# EAGLE board ModuleCarrier-RAK811-v1.0.0 (EAGLE 7.7.0)
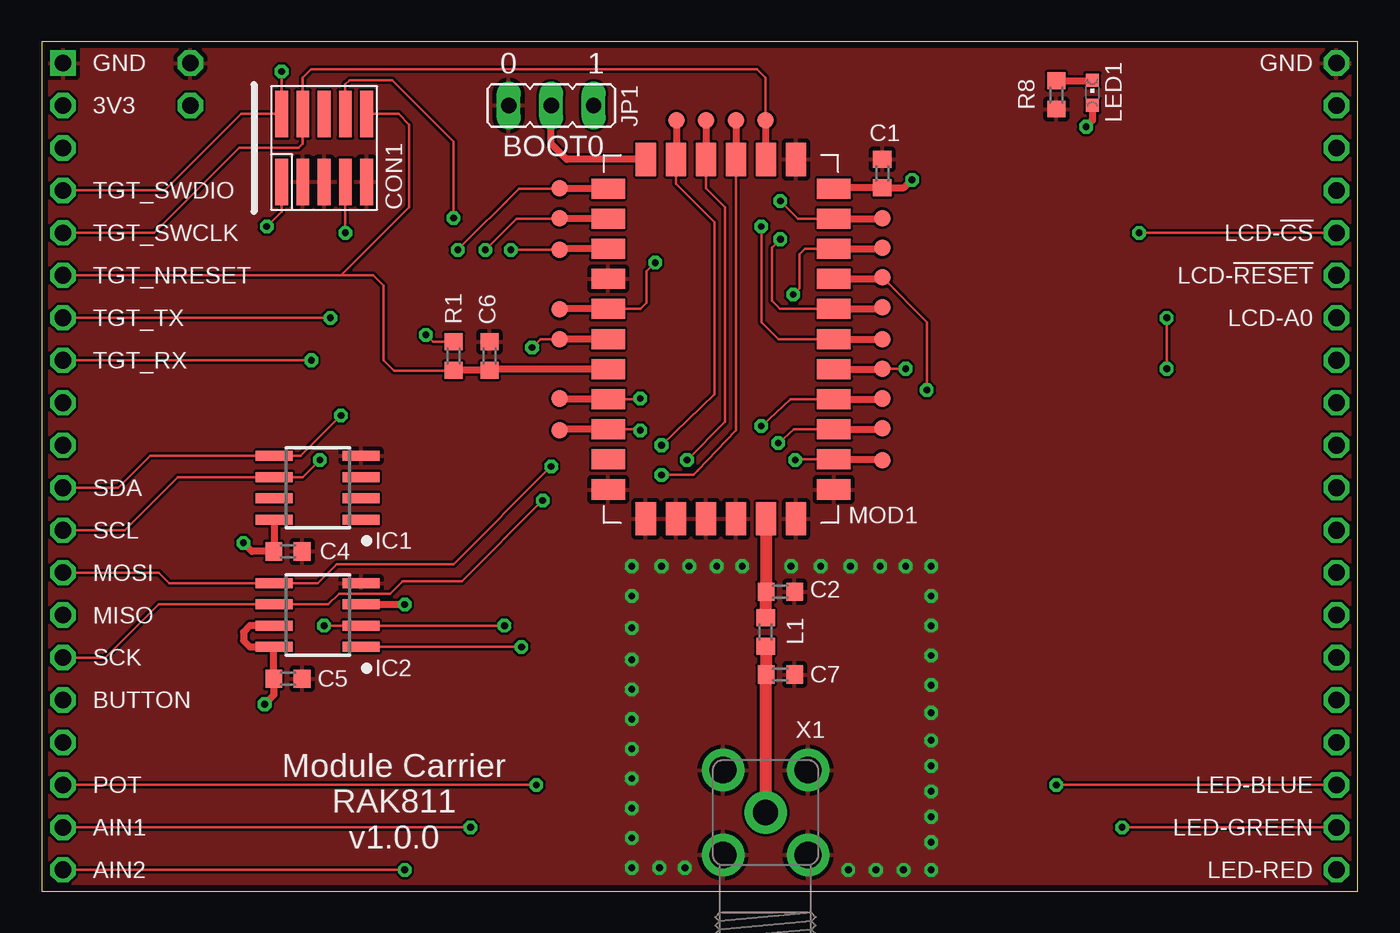
[diagram p0: board, top side]
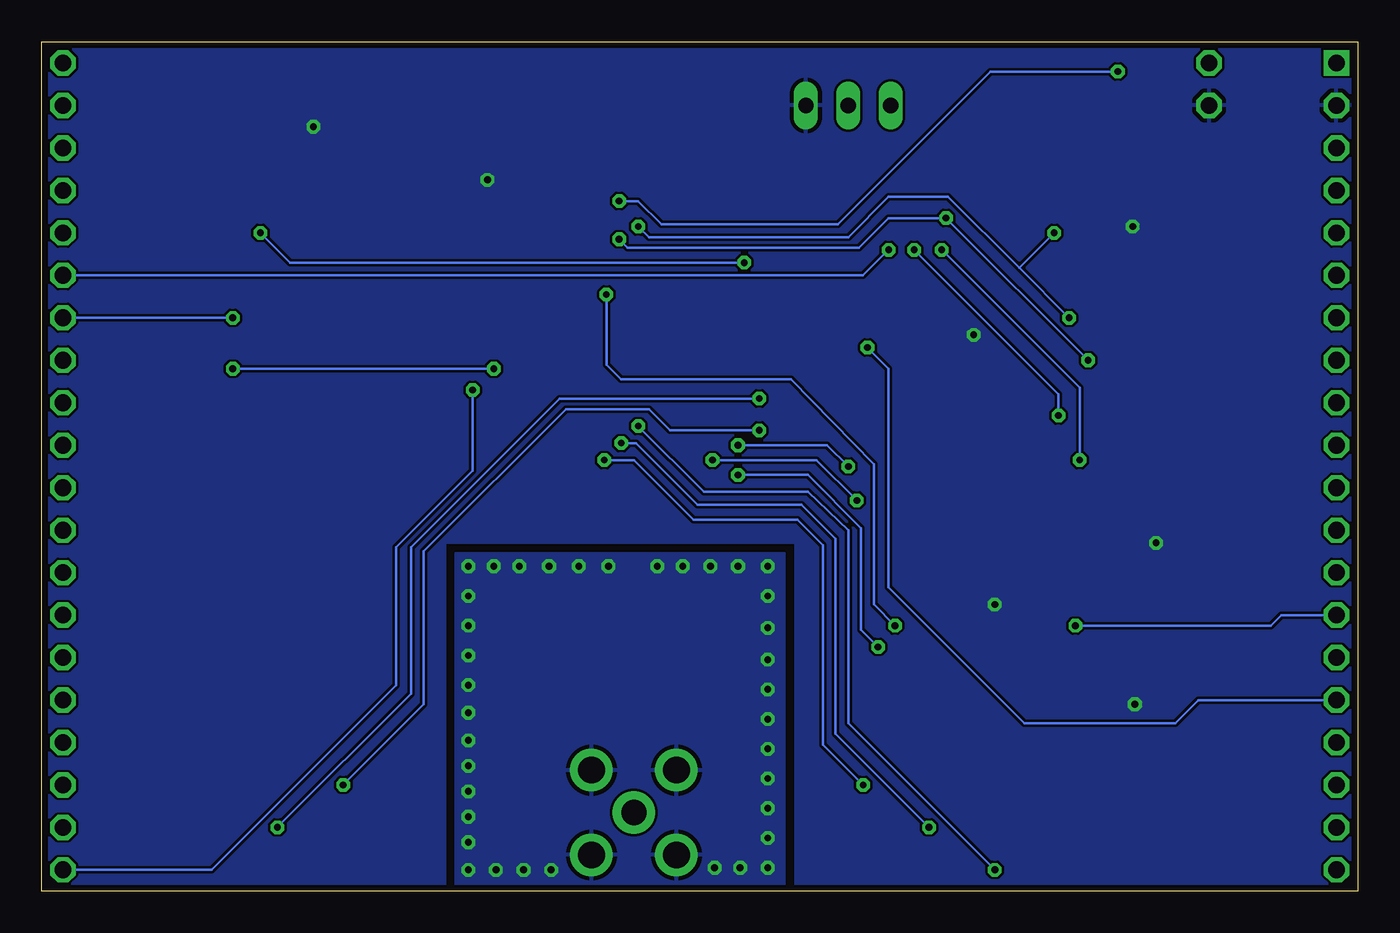
[diagram p1: board, bottom side, seen from below]

Size 78.74 x 50.8 mm. Coordinates in mm from the lower left corner, seen from the top.
Copper layers ((1*16)): Top 0.035mm / dielectric 0.8mm / Bottom 0.035mm
Design rules "mbed-HDK-6-6-2-layer": minimum track width 6mil, minimum drill 9mil, track to track 6mil, track to pad 6mil, pad to pad 6mil, via to via 6mil, smd to smd 6mil, copper to edge 15mil, drill to drill 8mil, minimum pad ring 10mil, minimum via ring 8mil, stop-mask expansion 4mil, vias tented up to drill 0mil, thermal gap 10mil

## Footprints (pad centres in the part's own frame; a part is rotated, then mirrored left to right if it is on the bottom)
0603 = smd 1 x 1.1: 1 -0.85,0; 2 0.85,0
FTSH-105-02 = smd 0.762 x 2.794: 1 0.381,-2.032; 2 0.381,2.032; 3 1.651,-2.032; 4 1.651,2.032; 5 2.921,-2.032; 6 2.921,2.032; 7 4.191,-2.032; 8 4.191,2.032; 9 5.461,-2.032; 10 5.461,2.032
SO8 = smd 0.6 x 2.2: 1 -1.905,-2.6; 2 -0.635,-2.6; 3 0.635,-2.6; 4 1.905,-2.6; 5 1.905,2.6; 6 0.635,2.6; 7 -0.635,2.6; 8 -1.905,2.6
JP2 = drill 0.914 long: 1 -2.54,0; 2 0,0; 3 2.54,0
CHIPLED_0603 = smd 0.8 x 0.8: A 0,-0.75; C 0,0.75
RAK811 = smd 2 x 1.2: 1 -6.75,9; 2 -6.75,7.2; 3 -6.75,5.4; 4 -6.75,3.6; 5 -6.75,1.8; 6 -6.75,0; 7 -6.75,-1.8; 8 -6.75,-3.6; 9 -6.75,-5.4; 10 -6.75,-7.2; 11 -6.75,-9; 18 6.75,-9; 19 6.75,-7.2; 20 6.75,-5.4; 21 6.75,-3.6; 22 6.75,-1.8; 23 6.75,0; 24 6.75,1.8; 25 6.75,3.6; 26 6.75,5.4; 27 6.75,7.2; 28 6.75,9 | smd 1.2 x 2: 12 -4.5,-10.75; 13 -2.7,-10.75; 14 -0.9,-10.75; 15 0.9,-10.75; 16 2.7,-10.75; 17 4.5,-10.75; 29 4.5,10.75; 30 2.7,10.75; 31 0.9,10.75; 32 -0.9,10.75; 33 -2.7,10.75; 34 -4.5,10.75
MODULE_DAUGHTER = drill 1 square: 1 0,0 | drill 1 octagon: 2 0,-2.54; 3 0,-5.08; 4 0,-7.62; 5 0,-10.16; 6 0,-12.7; 7 0,-15.24; 8 0,-17.78; 9 0,-20.32; 10 0,-22.86; 11 0,-25.4; 12 0,-27.94; 13 0,-30.48; 14 0,-33.02; 15 0,-35.56; 16 0,-38.1; 17 0,-40.64; 18 0,-43.18; 19 0,-45.72; 20 0,-48.26; 21 76.2,-48.26; 22 76.2,-45.72; 23 76.2,-43.18; 24 76.2,-40.64; 25 76.2,-38.1; 26 76.2,-35.56; 27 76.2,-33.02; 28 76.2,-30.48; 29 76.2,-27.94; 30 76.2,-25.4; 31 76.2,-22.86; 32 76.2,-20.32; 33 76.2,-17.78; 34 76.2,-15.24; 35 76.2,-12.7; 36 76.2,-10.16; 37 76.2,-7.62; 38 76.2,-5.08; 39 76.2,-2.54; 40 76.2,0
TP50-PTH = drill 1 octagon: TP 0,0
TP10R = smd 1 x 1: TP 0,0
SMA90_DIP = drill 1.5 pad 2.54: ANTENNA 0,0 | drill 1.6 pad 2.54: GND1 -2.54,2.54; GND2 2.54,2.54; GND3 -2.54,-2.54; GND4 2.54,-2.54

## Placement (x,y rotation side)
C1  100nF  [0603]  50.29,42.93 90 top
C2  3p7f  [0603]  44.2,17.91 0 top
C4  100nF  [0603]  14.73,20.32 0 top
C5  100nF  [0603]  14.73,12.7 0 top
C6  100nF  [0603]  26.8,32 90 top
C7  3p7F  [0603]  44.2,12.95 0 top
CON1  SWD-10/TC2050_SMD  [FTSH-105-02]  13.97,44.45 0 top
IC1  ATECC608A  [SO8]  16.51,24.13 90 top
IC2  MX25R3235FM1IH0  [SO8]  16.51,16.51 90 top
JP1  BOOT0  [JP2]  30.48,46.99 0 top
L1  9n2H  [0603]  43.31,15.49 90 top
LED1  RED  [CHIPLED_0603]  62.87,47.75 0 top
MOD1  RAK811  [RAK811]  40.64,33.02 180 top
MOD2  MODULE_DAUGHTER  [MODULE_DAUGHTER]  1.27,49.53 0 top
R1  10k  [0603]  24.64,32 90 top
R8  1k  [0603]  60.71,47.62 90 top
TP1  TEST-POINT-50R-PTH  [TP50-PTH]  8.89,46.99 0 top
TP2  TEST-POINT-50R-PTH  [TP50-PTH]  8.89,49.53 0 top
TP3  PTR1TP10R  [TP10R]  50.29,40.26 0 top
TP4  PTR1TP10R  [TP10R]  43.31,46.1 0 top
TP5  PTR1TP10R  [TP10R]  50.29,33.02 0 top
TP6  PTR1TP10R  [TP10R]  50.29,34.92 0 top
TP7  PTR1TP10R  [TP10R]  30.99,33.02 0 top
TP8  PTR1TP10R  [TP10R]  30.99,34.8 0 top
TP9  PTR1TP10R  [TP10R]  30.99,38.35 0 top
TP10  PTR1TP10R  [TP10R]  50.29,31.24 0 top
TP11  PTR1TP10R  [TP10R]  50.29,36.7 0 top
TP12  PTR1TP10R  [TP10R]  50.29,29.46 0 top
TP13  PTR1TP10R  [TP10R]  50.29,27.69 0 top
TP14  PTR1TP10R  [TP10R]  50.29,25.78 0 top
TP15  PTR1TP10R  [TP10R]  30.99,27.56 0 top
TP16  PTR1TP10R  [TP10R]  30.99,29.46 0 top
TP17  PTR1TP10R  [TP10R]  30.99,40.26 0 top
TP18  PTR1TP10R  [TP10R]  30.99,42.04 0 top
TP19  PTR1TP10R  [TP10R]  41.53,46.1 0 top
TP20  PTR1TP10R  [TP10R]  37.97,46.1 0 top
TP21  PTR1TP10R  [TP10R]  50.29,38.48 0 top
TP22  PTR1TP10R  [TP10R]  39.75,46.1 0 top
X1  SMACONNECTOR  [SMA90_DIP]  43.31,4.7 180 top

## Library data of the parts
C1 C2 C4-C7 L1 R1 R8 = mbed-HDK-RLC
CON1 = mbed-HDK-Connector
IC1 JP1 MOD1 MOD2 TP3-TP22 = blackbriar
IC2 = blackbriar; MF: Macronix; MFN: MX25R3235FM2IH0; OC-DIGIKEY: 1092-1174-ND
LED1 = mbed-HDK-Optical; MF: Wurth Electronics Inc; MFN: 150060RS75000; OC-DIGIKEY: 732-4978-1-ND; OC-MOUSER: 710-150060RS75000; OC-NEWARK: 2322071
TP1 TP2 = mbed-HDK
X1 = SMACONNECTOR; AVAILABILITY: Good; DESCRIPTION: CONNECTOR, SMA, ANTENNA; SVHC: No SVHC (19-Dec-2012); For Use With: Antenna; Kit Contents: SMA Connector; MF: LPRS; MP: SMA CONNECTOR; PACKAGE: None; PRICE: 1.06 USD

## Nets
+3.3V_TGT: C1.1 C4.1 C5.1 CON1.1 IC1.8 IC2.3 IC2.7 IC2.8 JP1.3 LED1.A MOD1.11 MOD2.2 R1.2 TP1.TP
AIN1: MOD1.3 MOD2.19 TP13.TP
AIN2: MOD1.4 MOD2.20 TP12.TP
BLUE-LED: MOD1.26 MOD2.23 TP15.TP
BOOT0: JP1.2 MOD1.17
BUTTON: MOD1.23 MOD2.16 TP7.TP
FLASH_CS: IC2.1 MOD1.14 TP19.TP
GND: C1.2 C2.2 C4.2 C5.2 C6.2 C7.2 CON1.3 CON1.5 CON1.9 IC1.4 IC2.4 JP1.1 MOD1.1 MOD1.12 MOD1.21 MOD1.28 MOD1.29 MOD1.30 MOD1.31 MOD1.32 MOD1.34 MOD2.1 MOD2.40 R8.1 TP2.TP X1.GND1 X1.GND2 X1.GND3 X1.GND4
GREEN-LED: MOD1.25 MOD2.22 TP16.TP
LCD-!CS: MOD1.22 MOD2.36 TP8.TP
LCD-!RESET: MOD1.20 MOD2.35 TP9.TP
LCD-A0: MOD1.5 MOD2.34 TP10.TP
MISO: IC2.2 MOD1.9 MOD2.14 TP21.TP
MOSI: IC2.5 MOD1.16 MOD2.13 TP20.TP
N$9: C7.1 L1.1 X1.ANTENNA
PA_1: LED1.C R8.2
POT: MOD1.2 MOD2.18 TP14.TP
RED-LED: MOD1.8 MOD2.21 TP11.TP
RF_OUT: C2.1 L1.2 MOD1.33
SCK: IC2.6 MOD1.15 MOD2.15 TP22.TP
SCL: IC1.6 MOD1.18 MOD2.12 TP18.TP
SDA: IC1.5 MOD1.19 MOD2.11 TP17.TP
TGT_NRESET: C6.1 CON1.10 MOD1.24 MOD2.6 R1.1
TGT_RX: CON1.8 MOD1.7 MOD2.8 TP6.TP
TGT_SWCLK: CON1.4 MOD1.13 MOD2.5 TP4.TP
TGT_SWDIO: CON1.2 MOD1.10 MOD2.4 TP3.TP
TGT_TX: CON1.7 MOD1.6 MOD2.7 TP5.TP

## Tracks (layer width: path | path; a pad name or v marks a point on that pad's centre or on a via)
+3.3V_TGT  (via drill 0.41)
  Top 0.152: R1.2 23.41,32.85 v22.99,33.27 | CON1.1 14.35,40.64 v13.46,39.75
  Top 0.406: v13.33,11.18 13.88,11.72 C5.1 13.88,14.58 IC2.8 12.45,14.61 12.06,14.99 12.06,15.49 12.45,15.88 IC2.7 | LED1.A 62.87,46.1 v62.48,45.72 | v52.07,42.55 51.6,42.08 C1.1 47.45,42.08 MOD1.11 | v12.06,20.83 12.57,20.32 C4.1 13.91,20.35 IC1.8 | IC2.3 v21.72,17.15
  pour Bottom: 0,0 33.66,0 33.66,20.83 54.61,20.83 54.61,0 78.74,0 78.74,50.8 0,50.8
AIN1  (via drill 0.41)
  Top 0.152: MOD1.3 45.02,27.62 v44.07,26.8 | v25.65,3.81 MOD2.19
  Top 0.406: MOD1.3 50.23,27.62 TP13.TP
  Bottom 0.152: v44.07,26.8 43.18,26.8 39.5,23.11 33.27,23.11 31.24,21.08 31.24,9.4 v25.65,3.81
AIN2  (via drill 0.41)
  Top 0.152: MOD1.4 44.79,29.42 v43.05,27.81 | v21.72,1.27 MOD2.20
  Top 0.406: MOD1.4 50.25,29.42 TP12.TP
  Bottom 0.152: v43.05,27.81 39.12,23.88 32.89,23.88 30.48,21.59 30.48,10.03 v21.72,1.27
BLUE-LED  (via drill 0.41)
  Top 0.152: MOD1.26 35.75,27.62 v35.81,27.56 | v60.71,6.35 MOD2.23
  Top 0.406: MOD1.26 31.05,27.62 TP15.TP
  Bottom 0.152: v35.81,27.56 41.15,27.56 42.42,28.83 47.37,28.83 55.88,20.32 55.88,11.18 v60.71,6.35
BOOT0
  Top 0.406: MOD1.17 31.41,43.77 30.48,44.7 JP1.2
BUTTON  (via drill 0.41)
  Top 0.152: TP7.TP 29.84,33.02 v29.34,32.51
  Top 0.406: MOD1.23 TP7.TP
  Bottom 0.152: MOD2.16 9.53,11.43 10.92,10.03 19.94,10.03 28.07,18.16 28.07,31.24 v29.34,32.51
FLASH_CS  (via drill 0.41)
  Top 0.152: 41.53,43.78 41.53,27.56 39.24,25.15 38.99,24.89 v37.08,24.89 | v28.7,14.61 IC2.1
  Top 0.406: TP19.TP 41.53,43.78 MOD1.14
  Bottom 0.152: v37.08,24.89 32.89,24.89 29.72,21.72 29.72,15.62 v28.7,14.61
GND  (via drill 0.41)
  other vias: 35.31,1.4 35.31,3.18 35.31,4.95 35.31,6.73 35.31,8.51 35.31,10.29 35.31,12.06 35.31,13.84 35.31,15.75 35.31,17.65 35.31,19.43 37.08,19.43 38.74,19.43 40.39,19.43 41.91,19.43 44.83,19.43 46.61,19.43 48.39,19.43 50.17,19.43 51.69,19.43 53.21,19.43 53.21,17.65 53.21,15.88 53.21,14.1 53.21,12.32 53.21,10.67 53.21,9.02 53.21,7.49 53.21,5.97 53.21,4.45 53.21,2.92 53.21,1.27 36.96,1.4 38.48,1.4 51.56,1.27 49.91,1.27 48.26,1.27
  pour Top: 0,0 78.74,0 78.74,50.8 0,50.8
  pour Bottom: 34.29,0 53.98,0 53.98,20.19 34.29,20.19
GREEN-LED  (via drill 0.41)
  Top 0.152: MOD1.25 35.77,29.42 v35.81,29.46 | v64.64,3.81 MOD2.22
  Top 0.406: MOD1.25 31.03,29.42 TP16.TP
  Bottom 0.152: v35.81,29.46 47.75,29.46 56.64,20.57 56.64,11.81 v64.64,3.81
LCD-!CS  (via drill 0.41)
  Top 0.152: MOD1.22 35.84,34.82 36.2,35.18 36.2,37.08 v36.7,37.59 | v65.66,39.37 MOD2.36
  Top 0.406: MOD1.22 31.01,34.82 TP8.TP
  Bottom 0.152: v36.7,37.59 63.88,37.59 v65.66,39.37
LCD-!RESET  (via drill 0.41)
  Top 0.152: v28.07,38.35 TP9.TP
  Top 0.406: MOD1.20 31.05,38.42 TP9.TP
  Bottom 0.152: MOD2.35 29.59,36.83 v28.07,38.35
LCD-A0  (via drill 0.41)
  Top 0.152: v67.31,34.29 v67.31,31.24 | v51.69,31.24 TP10.TP
  Top 0.406: MOD1.5 50.27,31.22 TP10.TP
  Bottom 0.152: MOD2.34 v67.31,34.29 | v67.31,31.24 v51.69,31.24
MISO  (via drill 0.41)
  Top 0.152: v16.89,15.88 IC2.2 v27.69,15.88 | MOD1.9 45.66,38.42 45.34,38.1 45.34,36.07 v44.96,35.69
  Top 0.406: MOD1.9 50.23,38.42 TP21.TP
  Bottom 0.152: v16.89,15.88 5.21,15.88 4.57,16.51 MOD2.14 | v44.96,35.69 44.96,31.5 44.07,30.61 33.91,30.61 28.96,25.53 28.96,17.15 v27.69,15.88
MOSI  (via drill 0.41)
  Top 0.152: MOD2.13 6.98,19.05 7.62,18.42 IC2.5 16.51,18.42 17.65,19.56 24.64,19.56 v30.48,25.4 | MOD1.16 37.94,42.32 40.26,40.01 40.26,29.72 v37.08,26.67
  Top 0.406: TP20.TP 37.97,43.8 MOD1.16
  Bottom 0.152: v37.08,26.67 31.75,26.67 v30.48,25.4
N$9
  Top 0.73: L1.1 43.35,14.64 C7.1 43.31,12.95 X1.ANTENNA
PA_1
  Top 0.406: R8.2 62.84,48.48 LED1.C
POT  (via drill 0.41)
  Top 0.152: MOD1.2 45.12,25.82 v45.09,25.78 | v29.59,6.35 MOD2.18
  Top 0.406: MOD1.2 50.25,25.82 TP14.TP
  Bottom 0.152: v45.09,25.78 43.31,25.78 39.75,22.23 33.53,22.23 32,20.7 32,8.76 v29.59,6.35
RED-LED  (via drill 0.41)
  Top 0.152: TP11.TP 52.96,34.04 v52.96,29.97
  Top 0.406: MOD1.8 50.21,36.62 TP11.TP
  Bottom 0.152: MOD2.21 68.58,1.27 57.53,12.32 57.53,20.57 52.96,25.15 v52.96,29.97
RF_OUT
  Top 0.73: MOD1.33 C2.1 43.31,17.91 L1.2
SCK  (via drill 0.41)
  Top 0.152: MOD2.15 3.81,13.97 6.98,17.15 IC2.6 17.14,17.15 17.78,17.78 20.83,17.78 21.59,18.54 25.15,18.54 v29.97,23.37 | 39.75,43.78 39.75,42.04 40.89,40.89 40.89,28.07 v38.61,25.78
  Top 0.406: TP22.TP 39.75,43.78 MOD1.15
  Bottom 0.152: v38.61,25.78 32.38,25.78 v29.97,23.37
SCL  (via drill 0.41)
  Top 0.152: MOD2.12 4.95,21.59 8.13,24.77 IC1.6 15.62,24.77 v16.64,25.78 | 31,42.02 28.56,42.02 v24.89,38.35
  Top 0.406: MOD1.18 31,42.02 TP18.TP
  Bottom 0.152: v24.89,38.35 16.64,30.1 v16.64,25.78
SDA  (via drill 0.41)
  Top 0.152: MOD2.11 4.57,24.13 6.48,26.04 IC1.5 15.49,26.04 v17.91,28.45 | 31.03,40.22 28.41,40.22 v26.54,38.35
  Top 0.406: MOD1.19 31.03,40.22 TP17.TP
  Bottom 0.152: v17.91,28.45 17.91,29.72 v26.54,38.35
TGT_NRESET
  Top 0.152: MOD2.6 17.91,36.83 | CON1.10 21.34,46.48 21.97,45.85 21.97,40.89 17.91,36.83 | 28.57,31.35 28.7,31.22 | 17.91,36.83 19.81,36.83 20.45,36.2 20.45,31.75 21.08,31.12 24.6,31.12 R1.1
  Top 0.406: MOD1.24 28.7,31.22 26.86,31.22 C6.1 R1.1
TGT_RX  (via drill 0.41)
  Top 0.152: MOD2.8 v16.13,31.75 | MOD1.7 44.17,34.82 43.69,35.31 43.69,38.48 v44.2,38.99 | CON1.8 18.16,48.26 18.41,48.51 20.95,48.51 24.64,44.83 v24.64,40.26
  Top 0.406: MOD1.7 50.19,34.82 TP6.TP
  Bottom 0.152: v44.2,38.99 43.69,38.48 29.84,38.48 28.07,40.26 v24.64,40.26 v16.13,31.75
TGT_SWCLK
  Top 0.152: MOD2.5 6.73,39.37 11.81,44.45 15.37,44.45 15.62,44.7 CON1.4 15.62,48.64 16.13,49.15 42.8,49.15 43.31,48.64 TP4.TP
  Top 0.406: MOD1.13 43.34,46.07 TP4.TP
TGT_SWDIO  (via drill 0.41)
  Top 0.152: MOD2.4 7.37,41.91 11.94,46.48 CON1.2 v14.35,49.02 | MOD1.10 45.25,40.22 v44.2,41.27
  Top 0.406: MOD1.10 50.25,40.22 TP3.TP
  Bottom 0.152: v44.2,41.27 43.05,41.27 41.66,39.88 31.11,39.88 21.97,49.02 v14.35,49.02
TGT_TX  (via drill 0.41)
  Top 0.152: MOD2.7 v17.27,34.29 | MOD1.6 44.07,33.02 43.05,34.04 v43.05,39.75 | CON1.7 v18.16,39.37
  Top 0.406: MOD1.6 TP5.TP
  Bottom 0.152: v43.05,39.75 42.42,39.12 30.48,39.12 28.07,41.53 24.51,41.53 20.26,37.27 | 20.26,37.27 v17.27,34.29 | v18.16,39.37 20.26,37.27

## Text on the board
tPlace: GND / 3V3 / / TGT_SWDIO / TGT_SWCLK / TGT_NRESET / TGT_TX / TGT_RX / / / SDA / SCL / MOSI / MISO / SCK / BUTTON / / POT / AIN1 / AIN2 | GND / / / / LCD-!CS / LCD-!RESET / LCD-A0 / / / / / / / / / / / LED-BLUE / LED-GREEN / LED-RED | 0 | 1 | BOOT0 | Module Carrier / RAK811 / v1.0.0